# Altium PCB twentyfive.PcbDoc
Units mm, origin at the board's own origin, x right, y up, seen from the top; angles counter-clockwise.
Board outline 76.2 x 40 mm, 2 copper layers (Top Layer, Bottom Layer); 3 components, 5 nets, 25 pads, 0 vias.
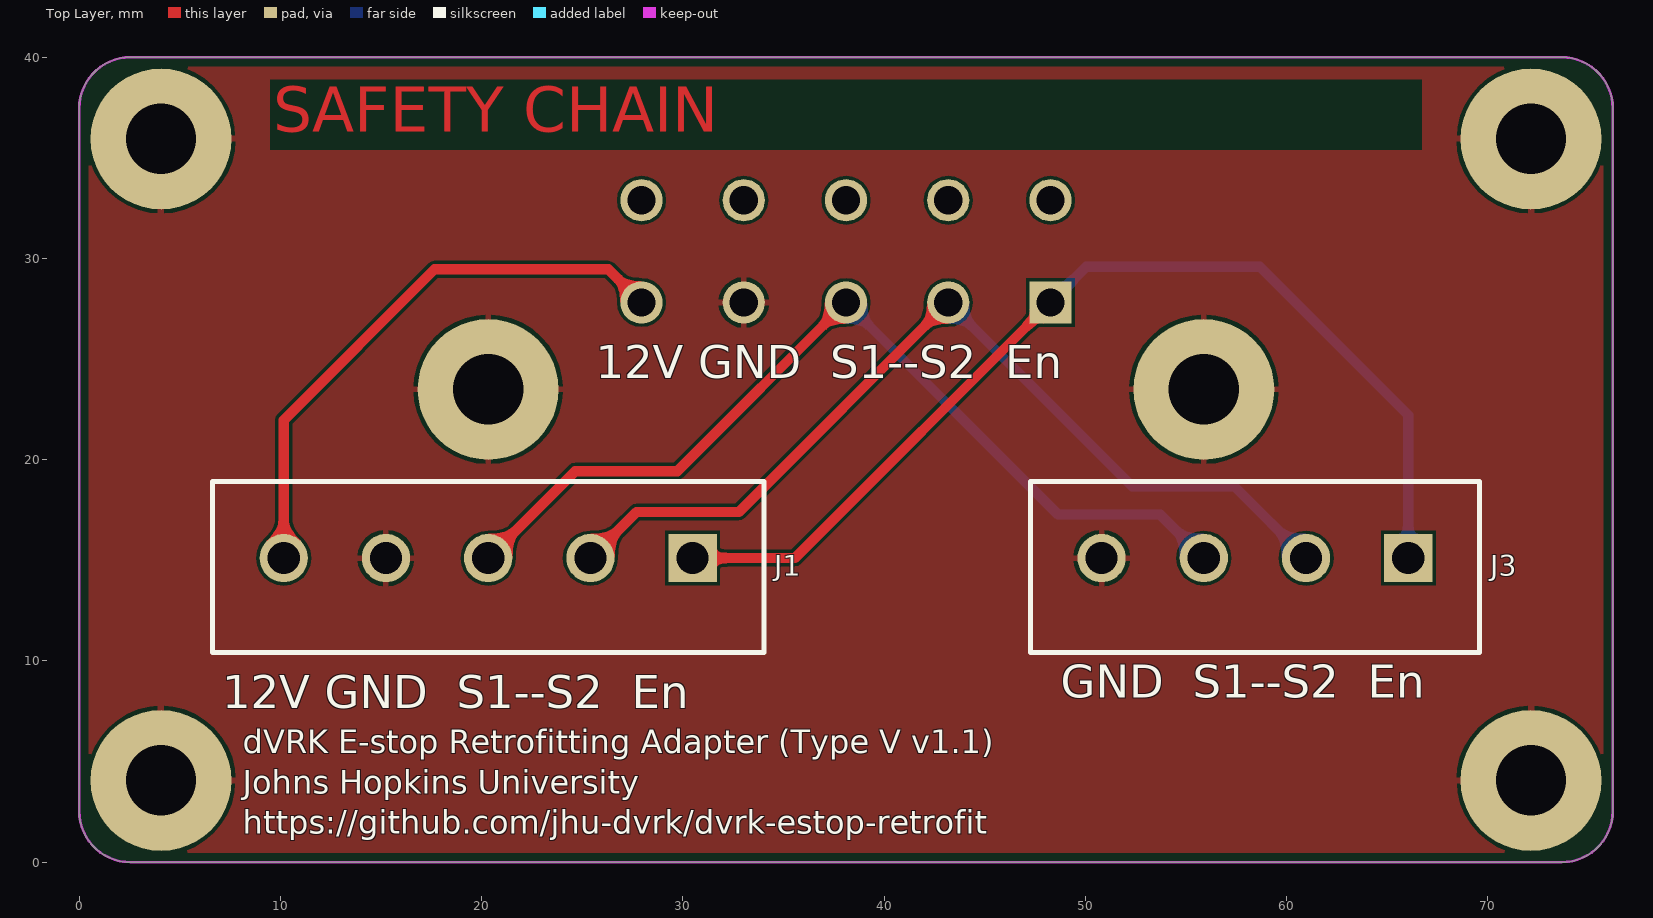
[diagram p0: Top Layer view]
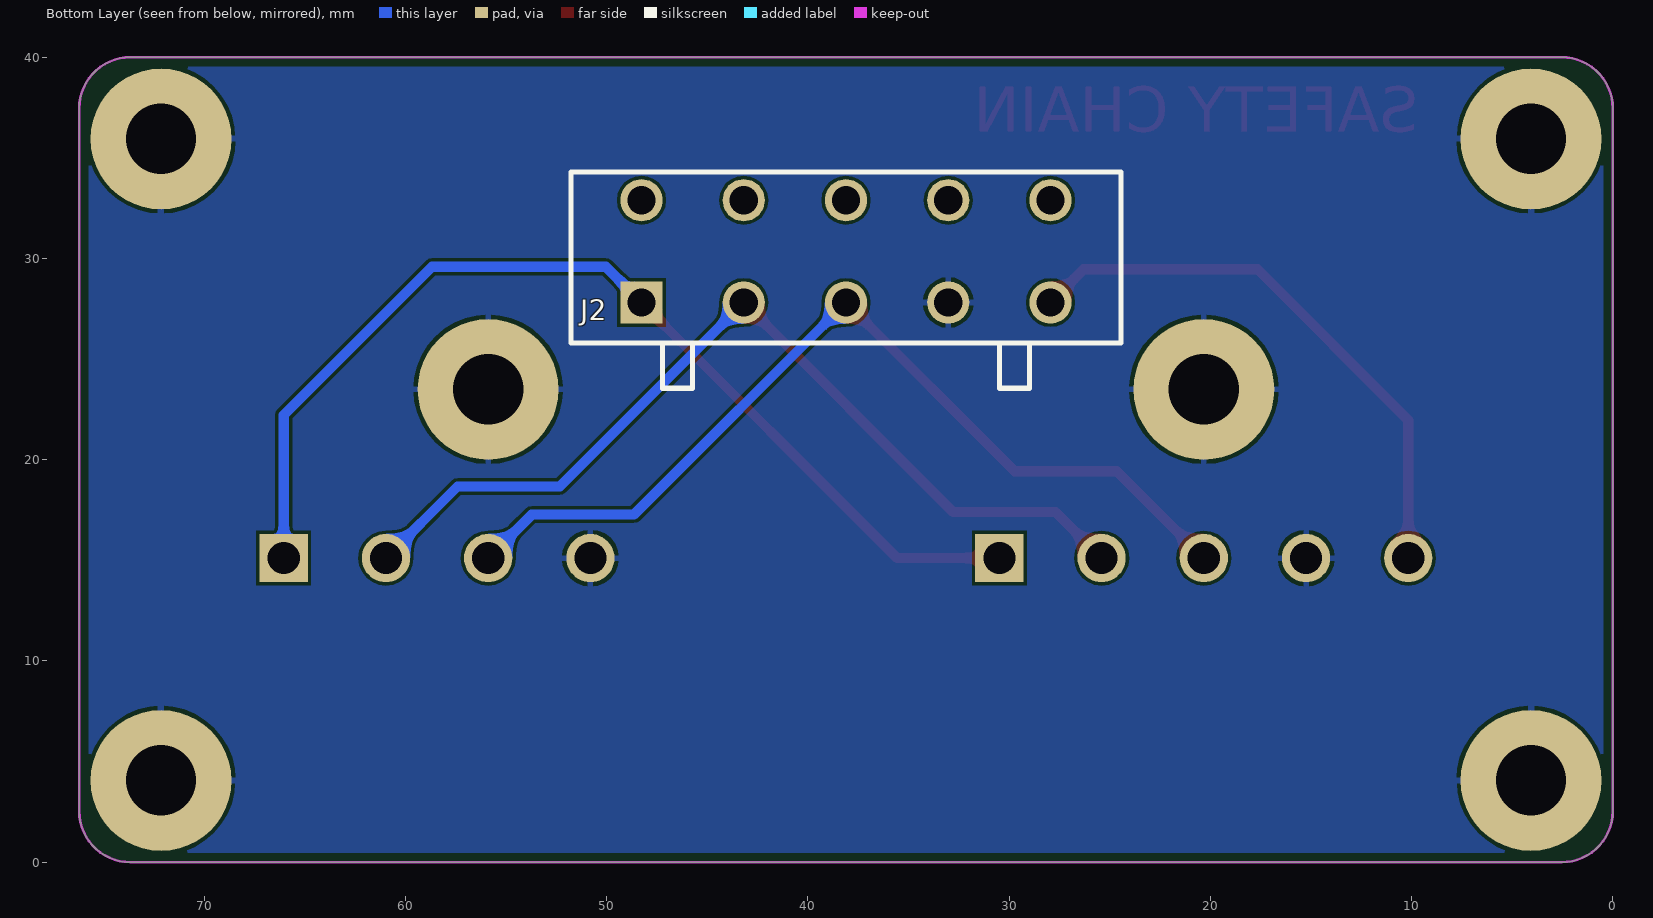
[diagram p1: Bottom Layer view, seen from below]

## Layer stack, top to bottom
Top Solder: solder mask 0.0102, Solder Resist, Dk 3.5
Top Layer: signal copper 0.0356
Dielectric 1: dielectric 0.32, FR-4, Dk 4.8
Bottom Layer: signal copper 0.0356
Bottom Solder: solder mask 0.0102, Solder Resist, Dk 3.5

## Board outline
0,2.54 0,37.46 cw(c2.54,37.46) 2.54,40 73.66,40 cw(c73.66,37.46) 76.2,37.46 76.2,2.54 cw(c73.66,2.54) 73.66,0 2.54,0 cw(c2.54,2.54)

## Design rules (kind name [scope] priority, off if disabled: settings)
BoardOutlineClearance [InNetClass('All Nets')] p1: gap=0.381 ignorepadtopadclearanceinfootprint=FALSE
Clearance Clearance_2 [InNetClass('100ohm') AND IsTrack vs InPolygon] p1: gap=0.5 ignorepadtopadclearanceinfootprint=FALSE
Clearance Clearance_1 [InComponent('U3') Or InComponent('U4') vs InComponent('U3') Or InComponent('U4')] p2 off: gap=0.15 ignorepadtopadclearanceinfootprint=FALSE
Clearance Clearance_diff [InNetClass('100ohm') vs InNetClass('100ohm')] p3: gap=0.153 ignorepadtopadclearanceinfootprint=TRUE
Clearance BoardEdge [All vs OnLayer('Keep-Out Layer')] p4: gap=0.4 ignorepadtopadclearanceinfootprint=FALSE
Clearance "Stitching GND" [IsStitchingVia and InNet('GND') vs (IsVia and (Not IsStitchingVia)) Or IsPad] p5 off: gap=0.127 ignorepadtopadclearanceinfootprint=FALSE except(0: Arc-Hole Track-Hole SMDPad-Hole THPad-Hole Via-Hole Fill-Hole Poly-Hole Region-Hole Text-Hole)
Clearance Clearance_outlinepolygon [inPolygon vs OnLayer('Keep-Out Layer')] p6 off: gap=0.5 ignorepadtopadclearanceinfootprint=FALSE
Clearance Clearance-polygonpolygon [InPolygon vs InPolygon] p7 off: gap=0.5 ignorepadtopadclearanceinfootprint=FALSE except(0: Arc-Hole Track-Hole SMDPad-Hole THPad-Hole Via-Hole Fill-Hole Poly-Hole Region-Hole Text-Hole)
Clearance Clearance-polygon-control-impedance [InPolygon vs InNetClass('100ohm')] p8: gap=0.5 ignorepadtopadclearanceinfootprint=FALSE
Clearance [All] p9: gap=0.153 ignorepadtopadclearanceinfootprint=TRUE
ComponentClearance [InComponentClass('no-clearance-check')] p1: gap=-999 collisioncheckmode=3 verticalgap=-999 showdistances=FALSE
ComponentClearance ComponentClearance_4 [All] p2: gap=0.254 collisioncheckmode=3 verticalgap=0.254 showdistances=FALSE
DiffPairsRouting [All] p1: maxlimit=0.254 minlimit=0.153 mostfreqgap=0.153 toplayer_minwidth=0.2 toplayer_maxwidth=1 toplayer_prefwidth=0.2 bottomlayer_minwidth=0.2 bottomlayer_maxwidth=1 bottomlayer_prefwidth=0.2 maxuncoupledlength=12.7
HoleSize [All] p1: absolutevalues=TRUE maxlimit=6 minlimit=0.3 maxpercent=80.000 minpercent=20.000
MatchedLengths [All] p1: tolerance=5 checknetsindiffpair=TRUE checkdiffpairvsdiffpair=FALSE checkxsignals=FALSE checkothers=FALSE
MinimumAnnularRing ignore [(HasFootprint('LMZ21701SIL') OR HasFootprint('m3 hole') OR HasFootprint('G3T-12AH'))] p1: minimumring=0
MinimumAnnularRing [All] p2: minimumring=0.178
MinimumSolderMaskSliver [All] p1: minsoldermaskwidth=0.076
NetAntennae [All] p1: netantennaetolerance=2
PolygonConnect PolygonConnect_heat [IsVia OR InPolygonClass('nothermalrelief') OR InPadClass('heatsink')      OR HasFootprint('tp-pad')] p1: connectstyle=Direct reliefconductorwidth=0.254 reliefentries=4 polygonreliefangle="90 Angle" airgapwidth=0.254
PolygonConnect [All] p2: connectstyle=Relief reliefconductorwidth=0.3 reliefentries=4 polygonreliefangle="90 Angle" airgapwidth=0.2
RoutingVias [All] p1: holewidth=0.3 width=0.3 viastyle="Through Hole" minholewidth=0.3 minwidth=0.62 maxholewidth=6.731 maxwidth=7.62 viatemplateguid#1={ECAECEE0-98E7-41BA-9EC3-9AF7EEB56C01} viatemplatename#1=signal
SilkToSilkClearance [All] p1 off: silktosilkclearance=0
SilkToSolderMaskClearance SilkToSolderMaskClearance_1 [HasFootprint('PAD-JUMPER-2-NO_YES_SILK')] p1: minsilkscreentomaskgap=0 clearancetoexposedcopper=TRUE
SilkToSolderMaskClearance [IsPad] p2: minsilkscreentomaskgap=0.15 clearancetoexposedcopper=TRUE
SolderMaskExpansion [All] p1: expansion=0.076
Width Width_1 [InNetClass('100ohm')] p1 off: maxlimit=0.254 minlimit=0.254 preferedwidth=0.254 impedancedriven=TRUE minimp=90.000000 maximp=110.000000 favimp=100.000000
Width [All] p2: maxlimit=25.375 minlimit=0.152 preferedwidth=0.3
23 further rules are at their usual default settings.

## Components (designator, comment, footprint, x,y, rotation, side; value= is the part's Value field where it differs from the comment)
J1 "691311500105" 691311500105 20.32,15.113 r180 top
J2 "691307500005" 691307500005 38.1,30.353 r180 bottom
J3 "691311500104" 691311500104 58.42,15.113 r180 top

## Footprints (in the part's own frame and the unit in brackets; to place one, negate y for a bottom-side part, rotate by r counter-clockwise, add the part's x,y. Pads: shape width x height; smd on the part's side, far side on the other; paste and mask are expansions set on the pad)
691307500005 [mm] "5.08 mm Reversed Gender Vertical PCB Header - 05p"
  rect 2.1x2.1 hole 1.4: 1(-10.16,-2.54)
  round 2.1 hole 1.4: 2(-5.08,-2.54) 3(0,-2.54) 4(5.08,-2.54) 5(10.16,-2.54) 6(10.16,2.54) 7(5.08,2.54) 8(0,2.54) 9(-5.08,2.54) 10(-10.16,2.54)
  silkscreen extent -13.66,-6.8 13.66,3.94, body extent -13.66,-6.85 13.66,3.94, height 19.15
691311500104 [mm] "5,08mm - PCB Headers - Vertical - Closed ends -04p"
  rect 2.4x2.4 hole 1.6: 1(-7.62,0)
  round 2.4 hole 1.6: 2(-2.54,0) 3(2.54,0) 4(7.62,0)
  silkscreen extent -11.16,-3.8 11.16,4.7, body extent -11.16,-3.8 11.16,4.7, height 12.02
691311500105 [mm] "5,08mm - PCB Headers - Vertical - Closed ends -05p"
  rect 2.4x2.4 hole 1.6: 1(-10.16,0)
  round 2.4 hole 1.6: 2(-5.08,0) 3(0,0) 4(5.08,0) 5(10.16,0)
  silkscreen extent -13.7,-3.8 13.7,4.7, body extent -13.7,-3.8 13.7,4.7, height 12.02

## Part data
J1: "WR-TBL Serie 311 - 5.08 mm Close Vertical PCB Header, 05p", ComponentLink1Description=Manufacturer, ComponentLink1URL=http://www.we-online.de, ComponentLink2Description=Datasheet, ComponentLink2URL=http://katalog.we-online.de/em/datasheet/6913115001xx.pdf, Part Number=691311500105, Pin Number=05p, Pitch="5.08 mm", Published Date="Feb. 2017", Publisher="Wurth Elektronik"
J2: "WR-TBL Serie 3075 - 5.08 mm Reversed Gender Vertical PCB Header, 05p", ComponentLink1Description=Manufacturer, ComponentLink1URL=http://www.we-online.de, ComponentLink2Description=Datasheet, ComponentLink2URL=http://katalog.we-online.de/em/datasheet/6913075000xx.pdf, Part Number=691307500005, Pin Number=05p, Pitch="5.08 mm", Published Date="Feb. 2017", Publisher="Wurth Elektronik"
J3: "WR-TBL Serie 311 - 5.08 mm Close Vertical PCB Header, 04p", ComponentLink1Description=Manufacturer, ComponentLink1URL=http://www.we-online.de, ComponentLink2Description=Datasheet, ComponentLink2URL=http://katalog.we-online.de/em/datasheet/6913115001xx.pdf, Part Number=691311500104, Pin Number=04p, Pitch="5.08 mm", Published Date="Feb. 2017", Publisher="Wurth Elektronik"

## Free pads (board coordinates)
  round 7 hole 3.5: 0(4.064,4.064) 0(4.064,35.941) 0(20.32,23.495) 0(55.88,23.495) 0(72.136,4.064) 0(72.136,35.941)

## Nets (pads, with @x,y where several pads share a name; then routed paths per layer and width w, separated by ;. In a path a pad name is that pad's centre, name@x,y a point inside that pad or via, vN(x,y) a via of type N, cw(c..) or ccw(c..) an arc to the next point about the centre after c; other vN are vias at no path point)
12V: J1.5 J2.5 | length 28.4
  Top Layer w0.508: J1.5 10.16,21.971 17.653,29.464 26.289,29.464 J2.5
En: J1.1 J2.1 J3.1 | length 51.7
  Top Layer w0.508: J1.1 35.56,15.113 J2.1
  Bottom Layer w0.508: J2.1 50.038,29.591 58.674,29.591 66.04,22.225 J3.1
GND: J1.4 J2.4 J3.4 pad.0
S1: J1.3 J2.3 J3.3 | length 46.1
  Top Layer w0.508: J1.3 24.638,19.431 29.718,19.431 J2.3
  Bottom Layer w0.508: J2.3 48.641,17.272 53.721,17.272 J3.3
S2: J1.2 J2.2 J3.2 | length 46.1
  Top Layer w0.508: J1.2 27.686,17.399 32.766,17.399 J2.2
  Bottom Layer w0.508: J2.2 52.324,18.669 57.404,18.669 J3.2
pads on no net: J2.6 J2.7 J2.8 J2.9 J2.10

## Polygon pours and split planes (outlines as drawn)
GND on Top Layer "GND_L01_P000" (solid, pour order 0): 0,2.54 0,37.46 cw(c2.54,37.46) 2.54,40 73.66,40 cw(c73.66,37.46) 76.2,37.46 76.2,2.54 cw(c73.66,2.54) 73.66,0 2.54,0 cw(c2.54,2.54)
GND on Bottom Layer "Top Layer-No Net" (solid, pour order 1): 0,2.54 0,37.46 cw(c2.54,37.46) 2.54,40 73.66,40 cw(c73.66,37.46) 76.2,37.46 76.2,2.54 cw(c73.66,2.54) 73.66,0 2.54,0 cw(c2.54,2.54)

## Keep-outs
Keep-Out Layer:
  the board outline again, w0.127

## Other copper
Top Layer:
  text "SAFETY CHAIN" at 9.652,35.56 h3.81

## Silkscreen, mask and mechanical layers (free items; w line width, h text height)
Top Overlay:
  text "12V GND  S1--S2  En" at 25.654,23.495 h2.79
  text "GND  S1--S2  En" at 48.768,7.62 h2.79
  text "12V GND  S1--S2  En" at 7.112,7.112 h2.79
  text "dVRK E-stop Retrofitting Adapter (Type V v1.1) / Johns Hopkins University / https://github.com/jhu-dvrk/dvrk-estop-retrofit" at 8.128,1.016 h2
Top Solder:
  text "SAFETY CHAIN" at 9.652,35.56 h3.81